# Altium PCB frostlightmini-pcb-altium.pcbdoc
Units mil, origin at the board's own origin, x right, y up, seen from the top; angles counter-clockwise.
Board outline 3200 x 3105 mil, 2 copper layers (Top Layer, Bottom Layer); 52 components, 41 nets, 192 pads, 320 vias.
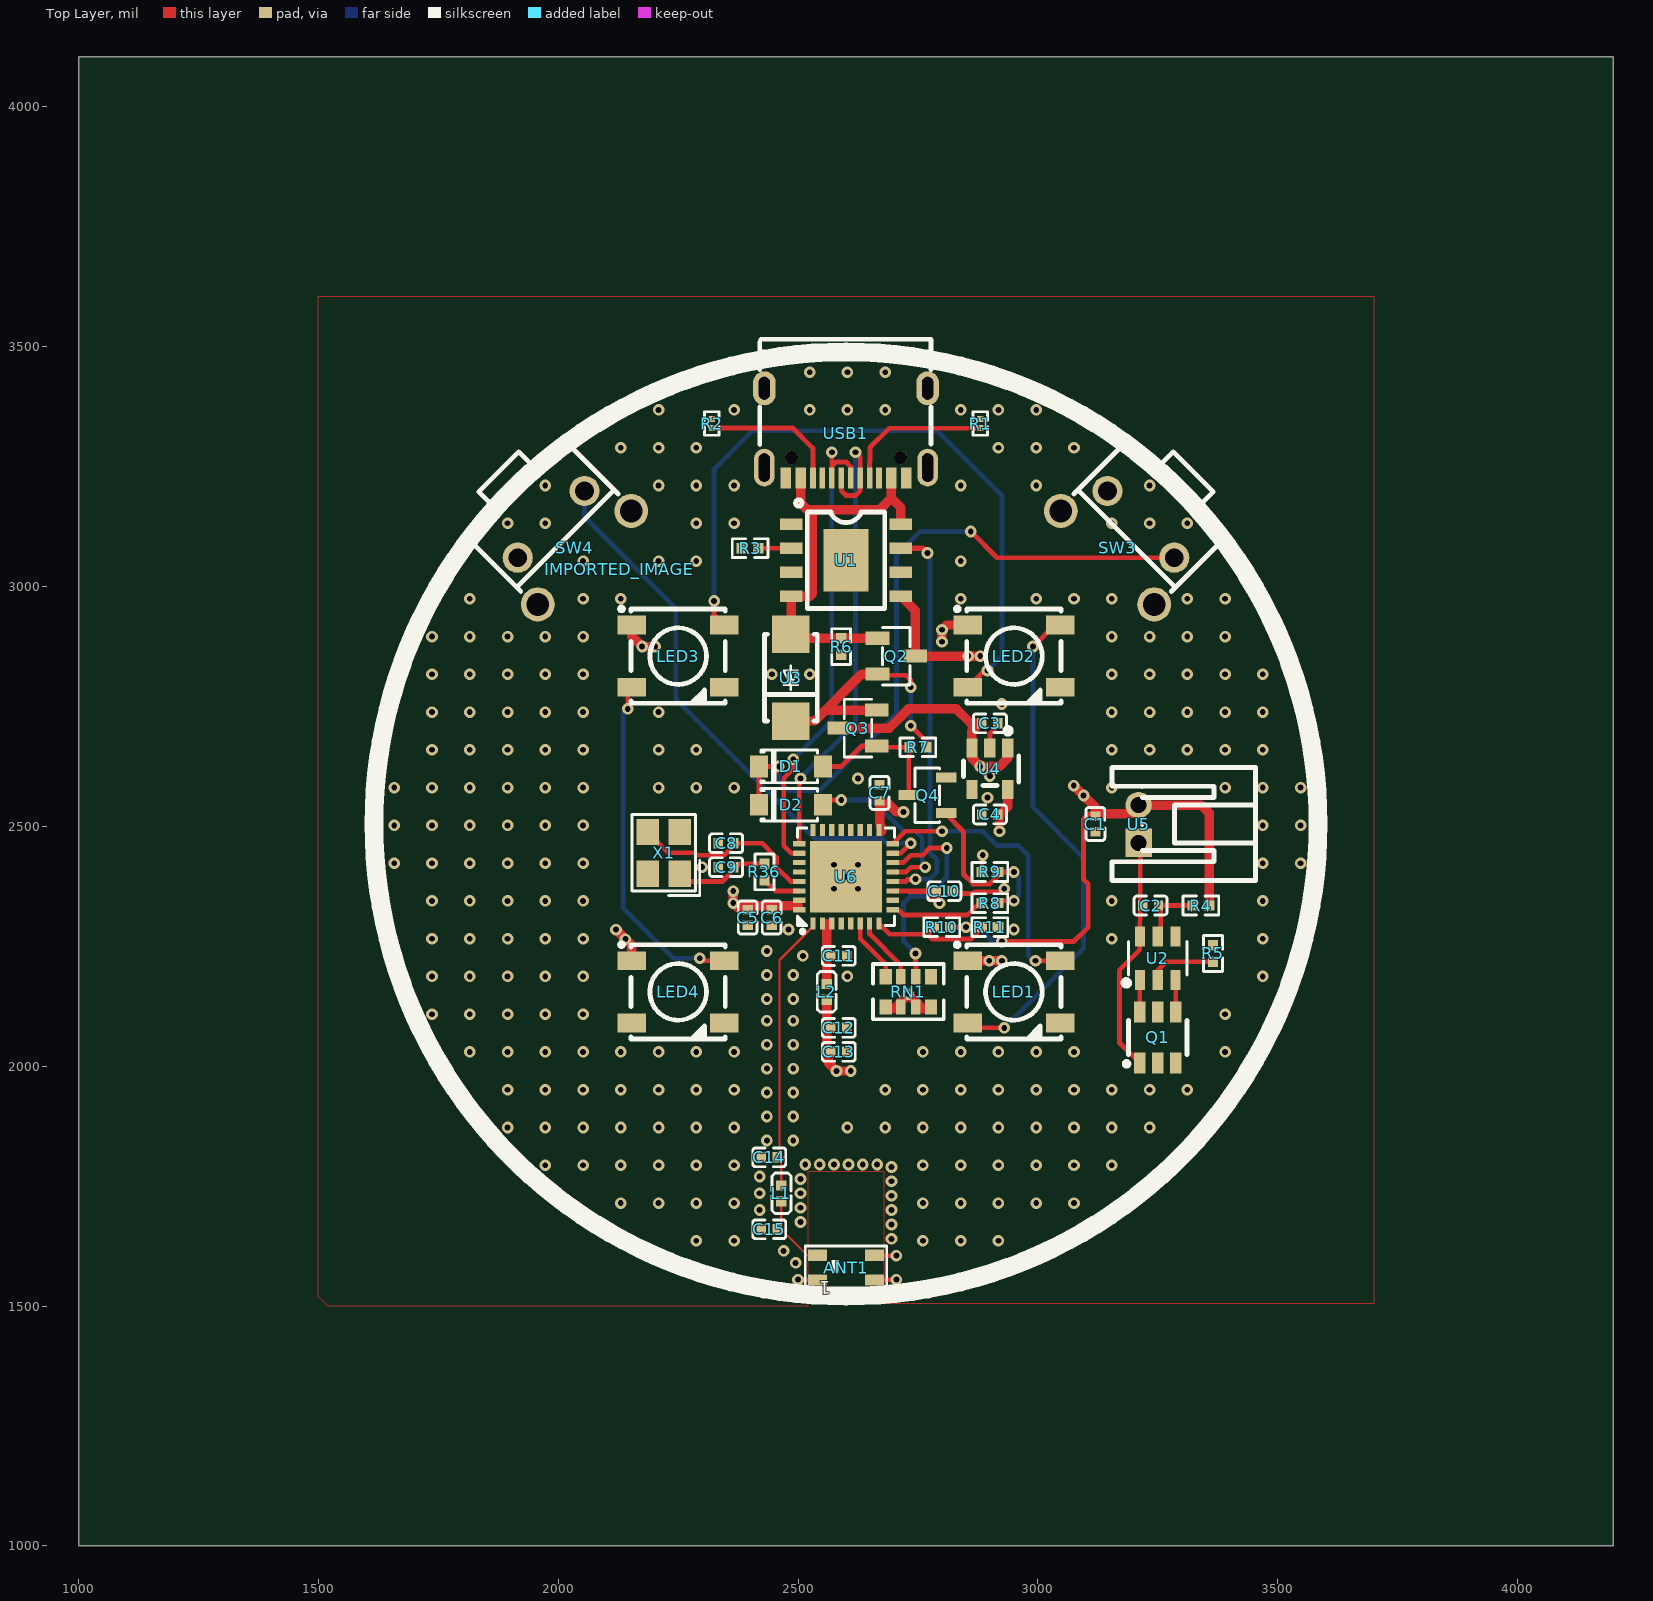
[diagram p0: Top Layer view]
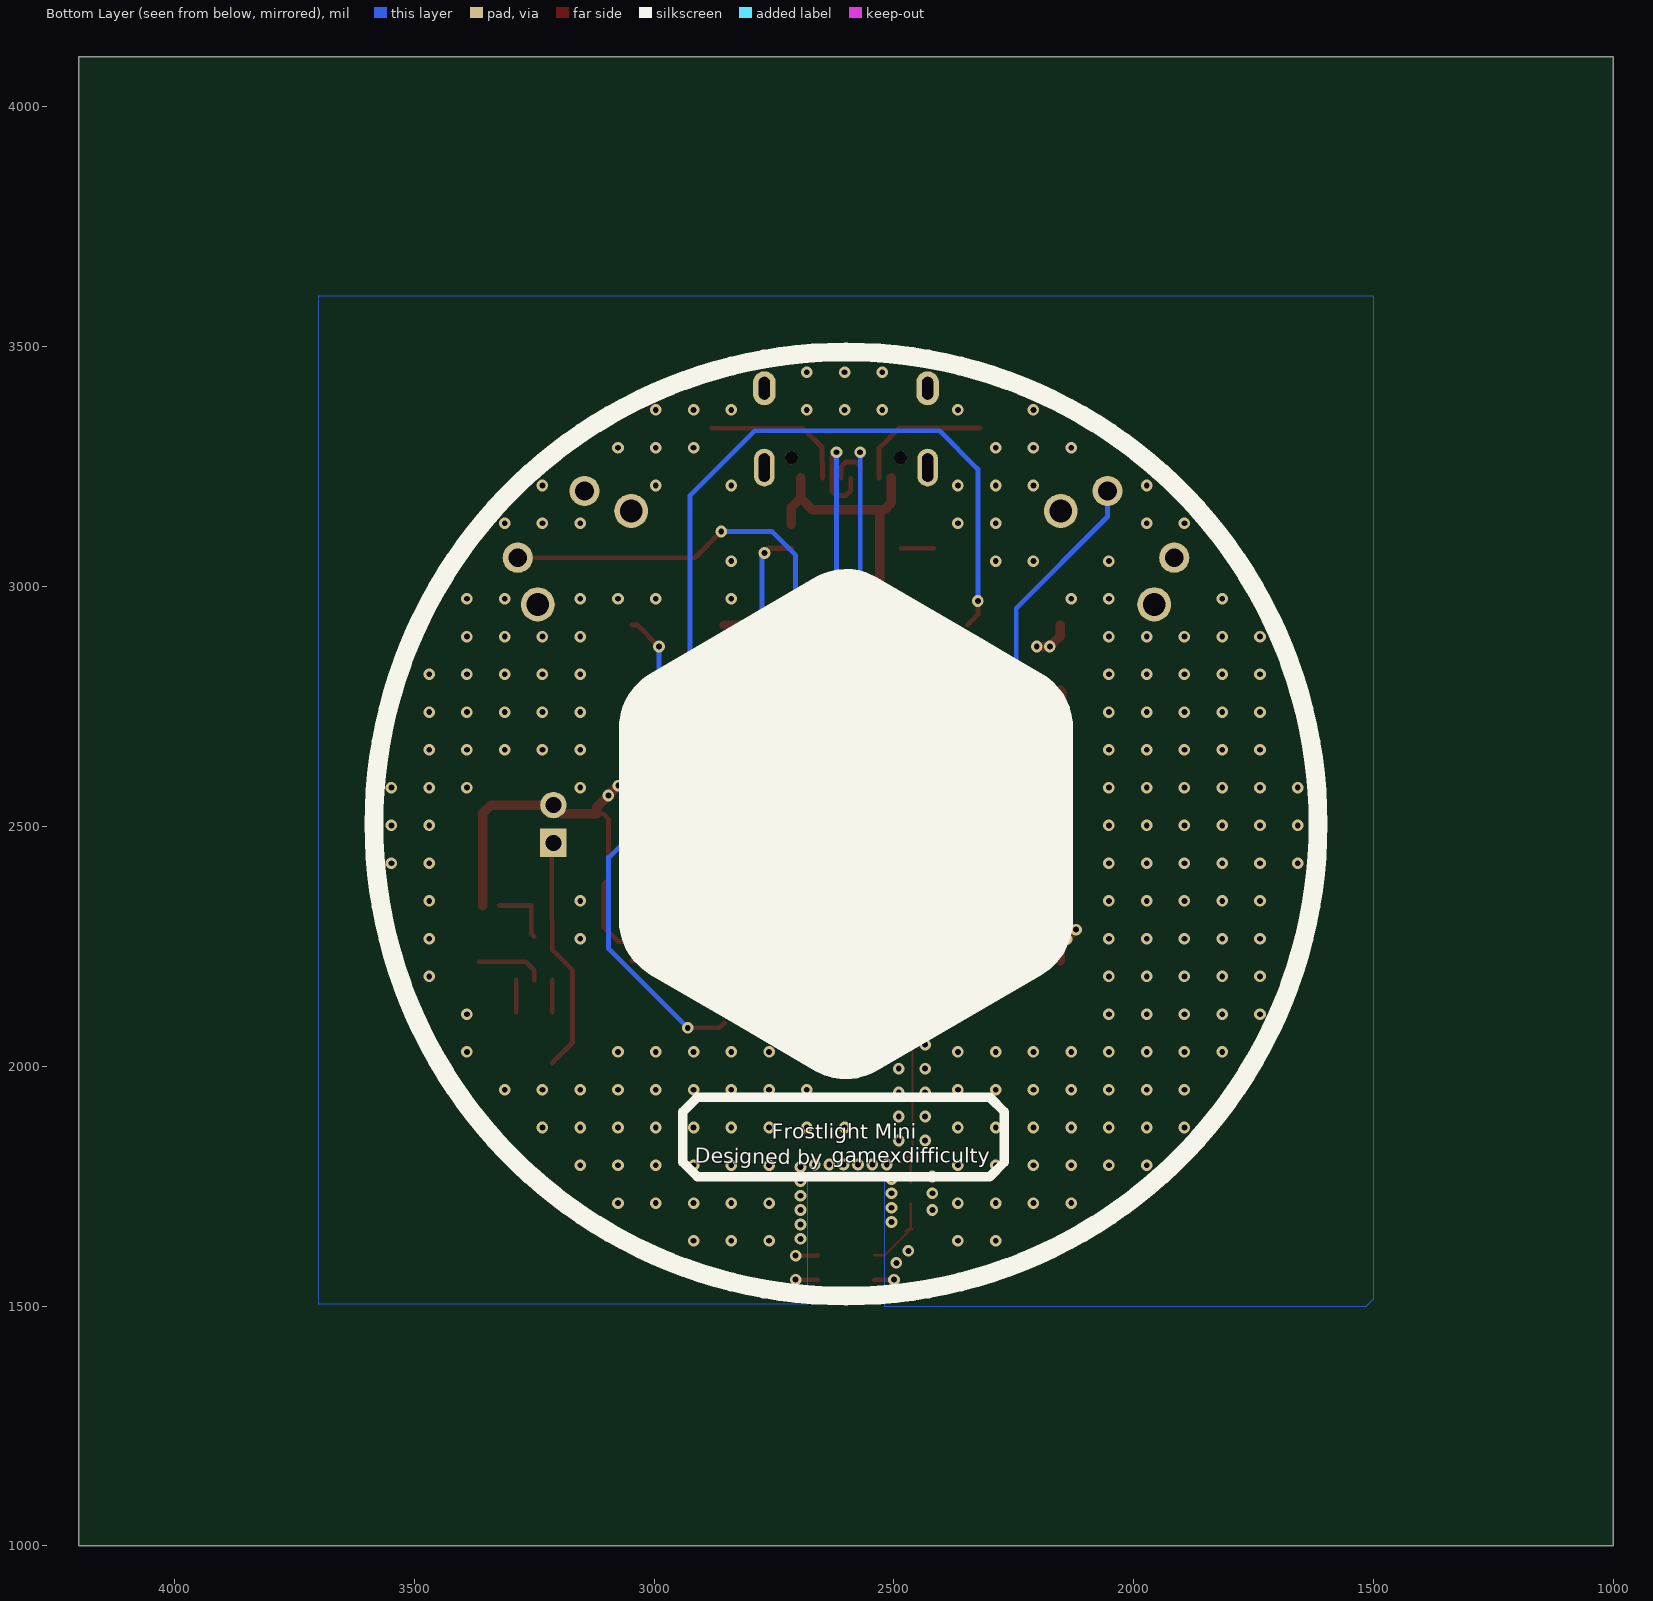
[diagram p1: Bottom Layer view, seen from below]

## Layer stack, top to bottom
Top Layer: signal copper (thickness not stored)
Dielectric: dielectric 12.6, FR-4, Dk 4.8
Bottom Layer: signal copper (thickness not stored)

## Board outline
4200,1000 1000,1000 1000,4105 4200,4105

## Components (designator, comment, footprint, x,y, rotation, side; value= is the part's Value field where it differs from the comment)
ANT1 "2450AT18D0100E" ANT-SMD_4P-L3.2-W1.6 2600,1580 r0 top
C1 "10uF" C0402 3120,2505 r270 top
C2 "10uF" C0402 3235,2335 r0 top
C3 "10uF" C0402 2900,2715 r0 top
C4 "10uF" C0402 2900,2525 r180 top
C5 "10nF" C0402 2395,2310 r90 top
C6 "1uF" C0402 2445,2310 r90 top
C7 "100nF" C0402 2670,2570 r90 top
C8 "10pF" C0402 2350,2465 r180 top
C9 "10pF" C0402 2350,2415 r0 top
C10 "100nF" C0402 2805,2365 r0 top
C11 "100nF" C0402 2585,2230 r180 top
C12 "100nF" C0402 2585,2080 r180 top
C13 "10uF" C0402 2585,2030 r180 top
C14 "3.3pF" C0402 2440,1810 r180 top
C15 "3.3pF" C0402 2440,1660 r180 top
D1 "BAT42W" SOD-123_L2.8-W1.8-LS3.7-RD 2485,2625 r0 top
D2 "BAT42W" SOD-123_L2.8-W1.8-LS3.7-RD 2485,2545 r0 top
IMPORTED_IMAGE "IMPORTED_IMAGE" IMPORTED_IMAGE 2127.56,3036.49 r0 top
L1 "2.7nH" L0402 2465,1735 r90 top
L2 "2nH" L0402 2560,2155 r270 top
LED1 "WS2812B-B/W" LED-SMD_4P-L5.0-W5.0-TL_WS2812B-B 2950,2155 r0 top
LED2 "WS2812B-B/W" LED-SMD_4P-L5.0-W5.0-TL_WS2812B-B 2950,2855 r0 top
LED3 "WS2812B-B/W" LED-SMD_4P-L5.0-W5.0-TL_WS2812B-B 2250,2855 r0 top
LED4 "WS2812B-B/W" LED-SMD_4P-L5.0-W5.0-TL_WS2812B-B 2250,2155 r0 top
Q1 "FS8205A" SOT-23-6_L2.9-W1.6-P0.95-LS2.8-BR 3250,2060 r270 top
Q2 "DMP1045U-7" SOT-23-3_L2.9-W1.3-P1.90-LS2.4-BR 2705,2855 r180 top
Q3 "SI2301_C2891731" SOT-23-3_L2.9-W1.3-P1.90-LS2.4-BR 2625,2705 r0 top
Q4 "S8050_C20069125" SOT-23-3_L2.9-W1.3-P1.90-LS2.3-BR 2770,2565 r0 top
R1 "5.1kΩ" R0201 2880,3340 r270 top
R2 "5.1kΩ" R0201 2320,3340 r270 top
R3 "2kΩ" R0402 2400,3080 r0 top
R4 "100Ω" R0402 3340,2335 r0 top
R5 "1kΩ" R0402 3365,2235 r270 top
R6 "10kΩ" R0402 2590,2875 r270 top
R7 "1MΩ" R0402 2750,2665 r0 top
R8 "10kΩ" R0402 2900,2340 r180 top
R9 "1MΩ" R0402 2900,2405 r0 top
R10 "100kΩ" R0402 2800,2290 r180 top
R11 "100kΩ" R0402 2900,2290 r180 top
R36 "10Ω" R0402 2430,2405 r90 top
RN1 "10kΩ" RES-ARRAY-SMD_0603-8P-L3.2-W1.6-BL 2730,2155.01 r0 top
SW3 "TS365ZJ" KEY-TH_TS365ZJ 3180,3095 r135 top
SW4 "TS365ZJ" KEY-TH_TS365ZJ 2020,3095 r225 top
U1 "TP4056" ESOP-8_L4.9-W3.9-P1.27-LS6.0-BL-EP 2600,3055 r270 top
U2 "DW01A" SOT-23-6_L2.9-W1.6-P0.95-LS2.8-BL 3250,2225 r0 top
U3 "SS34" DO-214AC_L4.3-W2.7-LS5.2-RD 2485,2810 r90 top
U4 "TPRT9080-33" SOT-23-5_L2.9-W1.6-P0.95-LS2.8-BR 2900,2620 r90 top
U5 "S2B-PH-K-S(LF)(SN)" CONN-TH_S2B-PH-K-S-LF-SN 3210,2505 r270 top
U6 "ESP32-C3FH4" QFN-32_L5.0-W5.0-P0.50-TL-EP3.7 2600,2395 r90 top
USB1 "TYPE-C" USB-C-SMD_TYPE-C-6PIN-2MD-073 2600,3320 r180 top
X1 "40MHz" CRYSTAL-SMD_4P-L3.2-W2.5-BL 2220,2445 r90 top

## Footprints (in the part's own frame and the unit in brackets; to place one, negate y for a bottom-side part, rotate by r counter-clockwise, add the part's x,y. Pads: shape width x height; smd on the part's side, far side on the other; paste and mask are expansions set on the pad)
ANT-SMD_4P-L3.2-W1.6 [mm]
  rect 1x0.6 smd paste+0 mask+0.051: 1(-1.5,-0.65) 2(1.5,-0.65) 3(1.5,0.65) 4(-1.5,0.65)
  silkscreen extent -2.16,-1.14 2.16,1.14
C0402 [mm]
  rect 0.5x0.54 smd paste+0 mask+0.051: 1(-0.42,0) 2(0.42,0)
  silkscreen extent -0.87,-0.5 0.87,0.5
CONN-TH_S2B-PH-K-S-LF-SN [mm]
  rect 1.5x1.4 hole 0.85 paste+0 mask+0.051: 1(1,0)
  round 1.4 hole 0.85 paste+0 mask+0.051: 2(-1,0)
  silkscreen extent -3,-1.4 3,6.2
CRYSTAL-SMD_4P-L3.2-W2.5-BL [mm]
  rect 1.4x1.2 smd paste+0 mask+0.051: 1(-1.1,-0.85) 2(1.1,-0.85) 3(1.1,0.85) 4(-1.1,0.85)
  silkscreen extent -2.26,-1.91 2.03,1.68
DO-214AC_L4.3-W2.7-LS5.2-RD [mm]
  rect 2x2 smd paste+0 mask+0.051: 1(-2.3,0) 2(2.3,0)
  silkscreen extent -2.3,-1.4 2.3,1.4
ESOP-8_L4.9-W3.9-P1.27-LS6.0-BL-EP [mm]
  rect 0.6x1.2 smd paste+0 mask+0.051: 1(-1.905,-2.908) 2(-0.635,-2.908) 3(0.635,-2.908) 4(1.905,-2.908) 5(1.905,2.908) 6(0.635,2.908) 7(-0.635,2.908) 8(-1.905,2.908)
  rect 3.3x2.4 smd paste+0 mask+0.051: 9(0,0)
  silkscreen extent -3.2,-2.67 2.55,2.05
IMPORTED_IMAGE [mil]
KEY-TH_TS365ZJ [mm]
  round 1.6 hole 1 paste+0 mask+0.051: 1(-2.5,-1.25) 2(2.5,-1.25)
  round 1.8 hole 1.2 paste+0 mask+0.051: 3(-3.5,1.25) 4(3.5,1.25)
  silkscreen extent -3.65,-5.17 3.65,0.13
L0402 [mm]
  rect 0.54x0.54 smd paste+0 mask+0.051: 1(-0.42,0) 2(0.42,0)
  silkscreen extent -1.07,-0.51 1.07,0.49
LED-SMD_4P-L5.0-W5.0-TL_WS2812B-B [mm]
  rect 1.5x1 smd paste+0 mask+0.051: 1(-2.45,1.65) 2(-2.45,-1.65) 3(2.45,-1.65) 4(2.45,1.65)
  silkscreen extent -3.1,-2.5 2.5,2.6
QFN-32_L5.0-W5.0-P0.50-TL-EP3.7 [mm]
  rect 0.65x0.28 smd paste-100 mask+0.051: 1(-2.478,1.75) 2(-2.478,1.25) 3(-2.478,0.75) 4(-2.478,0.25) 5(-2.478,-0.25) 6(-2.478,-0.75) 7(-2.478,-1.25) 8(-2.478,-1.75) 17(2.478,-1.75) 18(2.478,-1.25) 19(2.478,-0.75) 20(2.478,-0.25) 21(2.478,0.25) 22(2.478,0.75) 23(2.478,1.25) 24(2.478,1.75)
  rect 0.28x0.65 smd paste-100 mask+0.051: 9(-1.75,-2.478) 10(-1.25,-2.478) 11(-0.75,-2.478) 12(-0.25,-2.478) 13(0.25,-2.478) 14(0.75,-2.478) 15(1.25,-2.478) 16(1.75,-2.478) 25(1.75,2.478) 26(1.25,2.478) 27(0.75,2.478) 28(0.25,2.478) 29(-0.25,2.478) 30(-0.75,2.478) 31(-1.25,2.478) 32(-1.75,2.478)
  rect 3.8x3.8 smd paste-100 mask+0.051: 33(0,0)
  silkscreen extent -3,-2.58 2.58,2.58
R0201 [mil]
  rect 11.93x12.76 smd paste-3937.01 mask+2: 1(-9.51,0) 2(9.51,0)
  silkscreen extent -24,-15 24,15
R0402 [mm]
  rect 0.566x0.54 smd paste-100 mask+0.051: 1(-0.433,0) 2(0.433,0)
  silkscreen extent -0.94,-0.5 0.94,0.5
RES-ARRAY-SMD_0603-8P-L3.2-W1.6-BL [mm]
  rect 0.65x0.8 smd paste+0 mask+0.051: 1(-1.2,-0.8) 4(1.2,-0.8) 5(1.2,0.8) 8(-1.2,0.8)
  rect 0.5x0.8 smd paste+0 mask+0.051: 2(-0.4,-0.8) 3(0.4,-0.8) 6(0.4,0.8) 7(-0.4,0.8)
  silkscreen extent -1.87,-1.45 1.87,1.47
SOD-123_L2.8-W1.8-LS3.7-RD [mm]
  rect 0.95x1.15 smd paste+0 mask+0.051: 1(-1.693,0) 2(1.693,0)
  silkscreen extent -1.58,-0.87 1.41,0.87
SOT-23-3_L2.9-W1.3-P1.90-LS2.3-BR [mm]
  rect 1.07x0.532 smd paste+0 mask+0.051: 1(0.99,-0.95) 2(0.99,0.95) 3(-0.99,0)
  silkscreen extent -0.66,-1.45 0.64,1.45
SOT-23-3_L2.9-W1.3-P1.90-LS2.4-BR [mm]
  rect 1.25x0.7 smd paste+0 mask+0.051: 1(1,-0.95) 2(1,0.95) 3(-1,0)
  silkscreen extent -0.73,-1.53 0.73,1.53
SOT-23-5_L2.9-W1.6-P0.95-LS2.8-BR [mm]
  rect 1x0.6 smd paste+0 mask+0.05: 1(1.1,-0.95) 2(1.1,0) 3(1.1,0.95) 4(-1.1,0.95) 5(-1.1,-0.95)
  silkscreen extent -0.89,-1.52 2.16,1.4
SOT-23-6_L2.9-W1.6-P0.95-LS2.8-BL [mm]
  rect 0.532x1.072 smd paste+0 mask+0.051: 1(-0.95,-1.149) 2(0,-1.149) 3(0.95,-1.149) 4(0.95,1.149) 5(0,1.149) 6(-0.95,1.149)
  silkscreen extent -1.82,-1.45 1.54,0.89
SOT-23-6_L2.9-W1.6-P0.95-LS2.8-BR [mm]
  rect 1.1x0.6 smd paste+0 mask+0.051: 1(1.35,-0.95) 2(1.35,0) 3(1.35,0.95) 4(-1.35,0.95) 5(-1.35,0) 6(-1.35,-0.95)
  silkscreen extent -0.9,-1.78 1.52,1.55
USB-C-SMD_TYPE-C-6PIN-2MD-073 [mm]
  rect 0.55x1.1 smd paste-100 mask+0.05: 1(-3.2,2.375) 2(-2.4,2.375) 11(2.4,2.375) 12(3.2,2.375)
  rect 0.3x1.1 smd paste-100 mask+0.05: 3(-1.75,2.375) 4(-1.25,2.375) 5(-0.75,2.375) 6(-0.25,2.375) 7(0.25,2.375) 8(0.75,2.375) 9(1.25,2.375) 10(1.75,2.375)
  oval 1.2x1.8 hole 0.6 slot 1.2 at 90 deg paste+0 mask+0.05: 13(-4.325,-2.375) 14(4.325,-2.375)
  oval 1.1x2 hole 0.6 slot 1.5 at 90 deg paste+0 mask+0.05: 13(-4.325,1.825) 14(4.325,1.825)
  round 0.7 hole 0.7 unplated paste+0: ""(-2.89,1.305) ""(2.89,1.305)
  silkscreen extent -4.5,-4.97 4.57,0.6

## Via types
v1: diameter 24.02, hole 12.01, Top Layer to Bottom Layer, tented both sides, 216 vias
v2: diameter 24.41, hole 12.2, Top Layer to Bottom Layer, tented both sides, 104 vias

## Nets (pads, with @x,y where several pads share a name; then routed paths per layer and width w, separated by ;. In a path a pad name is that pad's centre, name@x,y a point inside that pad or via, vN(x,y) a via of type N, cw(c..) or ccw(c..) an arc to the next point about the centre after c; other vN are vias at no path point)
3.3V: C4.1 C5.2 C6.2 C7.1 C10.1 C12.2 C13.2 L2.2 RN1.1 RN1.2 RN1.3 RN1.4 U4.5 U6.11 U6.17 U6.31 U6.32 | length 2590.8
  Top Layer w10: U6.11 2730,2365.47
  Top Layer w11.81: 2731.46,2365 C10.1@2785,2365
  Top Layer w19.68: v2(2365,2365) v2(2365,2340) 2373.54,2331.46 C5.2@2395,2331.46 ; C5.2@2395,2335 2500,2335 ; L2.2@2560,2133.5 2560,2030 C13.2@2563.5,2030 ; C13.2@2563.54,2030 2563.54,2006.46 v2(2580,1990) v2(2610,1990) ; 2675,2490 2670,2510 2670,2548.5 2686.5,2548.5 2705,2530 v2(2720,2530) ; RN1.1@2682.76,2119.57 2699.57,2119.57 v2(2730,2150) ; RN1.2@2714.25,2119.57 2714.25,2134.25 v2(2730,2150) ; RN1.3@2745.75,2119.57 2745.75,2134.25 v2(2730,2150) ; RN1.4@2777.24,2119.57 2760.43,2119.57 v2(2730,2150) ; C10.1@2783.54,2365 2783.54,2351.46 v2(2795,2340) ; v2(2920,2490) 2920,2523.54 2921.46,2525 2937.4,2540.94 U4.5
  Mid-Layer 2 w19.68: v2(2365,2340) v2(2365,2365) 2400,2400 2400,2440 2480,2520 2710,2520 v2(2720,2530) 2780,2530 ; v2(2580,1990) v2(2610,1990) 2620,1990 2730,2100 v2(2730,2150) 2835,2255 2880,2255 2940,2315 2965,2315 2995,2345 2995,2370 2995,2455 2960,2490 v2(2920,2490) ; 2763.85,2530 2820,2530 2860,2490 v2(2920,2490) ; v2(2795,2340) 2840,2340 2920,2420 v2(2920,2490)
5V: Q2.1 R6.1 U1.4 U1.8 U3.2 USB1.2 USB1.11 | length 850.1
  Top Layer w19.68: U3.2@2485,2900.5 U1.4 2525,2980 2530,2985 2530,3152.61 2537.39,3160 ; U3.2 2493.15,2892.4 Q2.1 ; USB1.11 2505.5,3174.5 2520,3160 2670,3160 2694.5,3184.5 ; USB1.2 2694.5,3184.5 ; U1.8 2714.5,3164.5 2694.5,3184.5
BAT+: C1.1 Q2.3 R4.2 R10.1 U1.5 U5.2 | length 1810.9
  Top Layer w10: R10.1@2817.04,2295 2822.04,2290 v2(2850,2290) ; v2(2925,2260) 3075,2260 3105,2290 3105,2380 3095,2390 3095,2515 3106.5,2526.5 C1.1@3120,2526.5
  Top Layer w19.68: U1.5 2744.37,2950.13 Q2.3 v2(2880,2855) ; v2(3075,2585) v2(3095.43,2564.57) 3120,2540 C1.1@3120,2526.46 ; C1.1@3120,2526.5 3192.1,2526.5 U5.2 ; U5.2 3340.63,2544.37 3357.04,2527.96 R4.2
  Mid-Layer 2 w19.68: v2(2855,2855) v2(2880,2855) 2945,2855 2970,2830 2970,2740 3075,2635 v2(3075,2585) v2(3095.43,2564.57)
  Bottom Layer w10: v2(2850,2290) 2875,2290 2905,2260 v2(2925,2260)
BAT-: C2.1 Q1.1 U2.6 U5.1 | length 495.6
  Top Layer w10: U5.1 3213.54,2462.09 C2.1@3213.54,2335 ; Q1.1@3212.6,2006.85 3170,2049.45 3170,2200 3212.6,2242.6 U2.6 ; U2.6 C2.1@3213.5,2335
BATV: R10.2 R11.2 U6.8 | length 269.4
  Top Layer w10: U6.8 2691.36,2275 2770,2275 ; R10.2@2782.96,2295 2782.96,2287.96 2770,2275 ; R11.2@2883,2295 2883,2288 2860,2265 2780,2265 2770,2275
BTN1: SW4.1 U6.15 | length 1173.5
  Top Layer w10: U6.15 2714.21,2444.21 v2(2735,2465)
  Bottom Layer w10: SW4.1 2054.8,3145.2 2245,2955 2245,2765 2535,2475 2675,2475 2685,2465 v2(2735,2465)
BTN2: D2.2 U6.13 | length 379.4
  Top Layer w10: D2.2 2561.63,2555 v2(2590,2555) ; U6.13 2724.84,2404.84 2735,2415 v2(2765,2415)
  Bottom Layer w10: v2(2590,2555) 2655,2555 2720,2490 2745,2490 2758.95,2476.05 2758.95,2421.05 v2(2765,2415)
CHRG: U1.7 U6.12 | length 836.6
  Top Layer w10: U6.12 2724.09,2385 2728.22,2389.13 2744.13,2389.13 v2(2745,2390)
  Top Layer w11.81: U1.7 2760,3080 v2(2770,3070)
  Bottom Layer w10: v2(2745,2390) 2775,2390 2790,2405 2790,2430 2775,2445 2775,3070 v2(2770,3070)
D1_2: D1.2 Q3.1 Q4.3 R7.1 | length 300.9
  Top Layer w10: D1.2 2590,2625 2632.6,2667.6 Q3.1 ; Q3.1 2666.97,2665 R7.1 2731.01,2663.05 Q4.3
D2_1: D1.1 D2.1 SW3.1 | length 1424
  Top Layer w10: D2.1 D1.1 v2(2460,2625) ; v2(2860,3115) 2914.8,3060.2 SW3.1
  Bottom Layer w10: v2(2460,2625) 2460,2595 2480,2575 2545,2575 2705,2735 2705,3065 2755,3115 v2(2860,3115)
D+: U6.26 USB1.6 USB1.8 | length 1025.2
  Top Layer w10: v2(2490,2640) 2490,2620 2470,2600 2470,2460 2485.8,2444.2 U6.26 ; USB1.8 2570.5,3250.5 ; v2(2570.5,3280) 2570.5,3250.5 ; USB1.6 2609.8,3250.2 2600,3260 2580,3260 2570.5,3250.5
  Bottom Layer w10: v2(2490,2640) 2570.5,2720.5 v2(2570.5,3280)
D-: U6.25 USB1.5 USB1.7 | length 1023.2
  Top Layer w10: U6.25 2502.46,2597.46 v2(2505,2600) ; USB1.7 2590.2,3199.8 2600,3190 2620,3190 2629.5,3199.5 USB1.5 2629.53,3270.47 v2(2620,3280)
  Bottom Layer w10: v2(2505,2600) 2620,2715 v2(2620,3280)
GND: ANT1.1 ANT1.2 ANT1.3 C1.2 C3.2 C4.2 C5.1 C6.1 C7.2 C8.2 C9.1 C10.2 C11.1 C12.1 C13.1 C14.2 C15.2 LED1.3 LED2.3 LED3.3 LED4.3 Q1.3 Q4.2 R1.1 R2.1 R3.1 R5.1 R6.2 R9.1 R11.1 SW3.2 SW3.3 SW3.4 SW4.2 SW4.3 SW4.4 U1.1 U1.3 U1.9 U4.2 U6.33 USB1.1 USB1.12 USB1.13 USB1.14 X1.2 X1.4 | length 338.9
  Top Layer w10: v2(2500,1555) ANT1.1 ; ANT1.2 v2(2705,1555) ; ANT1.3 v2(2705,1605) ; C10.2@2826.46,2365 2831.46,2360 2865,2360 2868.95,2363.95 2923.95,2363.95 v2(2930,2370) ; R9.1 2882.96,2437.96 v2(2885,2440) ; U4.2 2900,2693.54 C3.2@2921.46,2715
  other v1: 2287.98,1635.99 2366.72,1635.99 2760.42,1635.99 2839.16,1635.99 2917.9,1635.99 2130.5,1714.73 2209.24,1714.73 2287.98,1714.73 2366.72,1714.73 2760.42,1714.73 2839.16,1714.73 2917.9,1714.73 2996.64,1714.73 3075.38,1714.73 1973.02,1793.47 2051.76,1793.47 2130.5,1793.47 2209.24,1793.47 2287.98,1793.47 2366.72,1793.47 2760.42,1793.47 2839.16,1793.47 2917.9,1793.47 2996.64,1793.47 3075.38,1793.47 3154.12,1793.47 1894.28,1872.21 1973.02,1872.21 2051.76,1872.21 2130.5,1872.21 2209.24,1872.21 2287.98,1872.21 2366.72,1872.21 2602.94,1872.21 2681.68,1872.21 2760.42,1872.21 2839.16,1872.21 2917.9,1872.21 2996.64,1872.21 3075.38,1872.21 3154.12,1872.21 3232.86,1872.21 1894.28,1950.95 1973.02,1950.95 2051.76,1950.95 2130.5,1950.95 2209.24,1950.95 2287.98,1950.95 2366.72,1950.95 2681.68,1950.95 2760.42,1950.95 2839.16,1950.95 2917.9,1950.95 2996.64,1950.95 3075.38,1950.95 3154.12,1950.95 3232.86,1950.95 3311.6,1950.95 1815.54,2029.69 1894.28,2029.69 1973.02,2029.69 2051.76,2029.69 2130.5,2029.69 2209.24,2029.69 2287.98,2029.69 2366.72,2029.69 2760.42,2029.69 2839.16,2029.69 2917.9,2029.69 2996.64,2029.69 3075.38,2029.69 3390.34,2029.69 1736.8,2108.43 1815.54,2108.43 1894.28,2108.43 1973.02,2108.43 2051.76,2108.43 3390.34,2108.43 1736.8,2187.17 1815.54,2187.17 1894.28,2187.17 1973.02,2187.17 2051.76,2187.17 2602.94,2187.17 3469.08,2187.17 1736.8,2265.91 1815.54,2265.91 1894.28,2265.91 1973.02,2265.91 2051.76,2265.91 3154.12,2265.91 3469.08,2265.91 1736.8,2344.65 1815.54,2344.65 1894.28,2344.65 1973.02,2344.65 2051.76,2344.65 3154.12,2344.65 3469.08,2344.65 1658.06,2423.39 1736.8,2423.39 1815.54,2423.39 1894.28,2423.39 1973.02,2423.39 2051.76,2423.39 3469.08,2423.39 3547.82,2423.39 1658.06,2502.13 1736.8,2502.13 1815.54,2502.13 1894.28,2502.13 1973.02,2502.13 2051.76,2502.13 3469.08,2502.13 3547.82,2502.13 1658.06,2580.87 1736.8,2580.87 1815.54,2580.87 1894.28,2580.87 1973.02,2580.87 2051.76,2580.87 2209.24,2580.87 2287.98,2580.87 2366.72,2580.87 3154.12,2580.87 3390.34,2580.87 3469.08,2580.87 3547.82,2580.87 1736.8,2659.61 1815.54,2659.61 1894.28,2659.61 1973.02,2659.61 2051.76,2659.61 2209.24,2659.61 2287.98,2659.61 3154.12,2659.61 3232.86,2659.61 3311.6,2659.61 3390.34,2659.61 3469.08,2659.61 1736.8,2738.35 1815.54,2738.35 1894.28,2738.35 1973.02,2738.35 2051.76,2738.35 2209.24,2738.35 3154.12,2738.35 3232.86,2738.35 3311.6,2738.35 3390.34,2738.35 3469.08,2738.35 1736.8,2817.09 1815.54,2817.09 1894.28,2817.09 1973.02,2817.09 2051.76,2817.09 2445.46,2817.09 2524.2,2817.09 3154.12,2817.09 3232.86,2817.09 3311.6,2817.09 3390.34,2817.09 3469.08,2817.09 1736.8,2895.83 1815.54,2895.83 1894.28,2895.83 1973.02,2895.83 2051.76,2895.83 3154.12,2895.83 3232.86,2895.83 3311.6,2895.83 3390.34,2895.83 1815.54,2974.57 2051.76,2974.57 2130.5,2974.57 2839.16,2974.57 2996.64,2974.57 3075.38,2974.57 3154.12,2974.57 3311.6,2974.57 3390.34,2974.57 2051.76,3053.31 2209.24,3053.31 2287.98,3053.31 2839.16,3053.31 1894.28,3132.05 1973.02,3132.05 2287.98,3132.05 2366.72,3132.05 3154.12,3132.05 3232.86,3132.05 3311.6,3132.05 1973.02,3210.79 2209.24,3210.79 2287.98,3210.79 2366.72,3210.79 2839.16,3210.79 2996.64,3210.79 3232.86,3210.79 2130.5,3289.53 2209.24,3289.53 2287.98,3289.53 2917.9,3289.53 2996.64,3289.53 3075.38,3289.53 2209.24,3368.27 2366.72,3368.27 2524.2,3368.27 2602.94,3368.27 2681.68,3368.27 2839.16,3368.27 2917.9,3368.27 2996.64,3368.27 2524.2,3447.01 2602.94,3447.01 2681.68,3447.01
  other v2: 2495,1590 2470,1615 2695,1640 2695,1670 2505,1675 2420,1700 2695,1700 2505,1705 2695,1730 2420,1735 2505,1735 2695,1760 2505,1765 2420,1770 2695,1790 2515,1795 2545,1795 2575,1795 2605,1795 2635,1795 2665,1795 2435,1845 2490,1845 2435,1895 2490,1895 2435,1945 2490,1945 2435,1995 2490,1995 2435,2045 2490,2045 2435,2095 2490,2095 2435,2140 2490,2140 2435,2190 2490,2190 2510,2230 2435,2240 2480,2285 2950,2285 2575,2370 2625,2370 2600,2395 2300,2415 2575,2420 2625,2420 2895,2560 2625,2600 2925,2755
L1_1: ANT1.4 C15.1 L1.1 | length 174.9
  Top Layer w4.72: L1.1@2465,1713.54 C15.1@2465,1660 ; 2475.59,1655.87 2471.46,1660 C15.1@2461.46,1660 ; ANT1.4@2540.95,1605.59 2519.41,1605.59 C15.1@2465,1660 ; C15.1@2461.46,1660 C15.1@2465,1660 ; C15.1@2461.46,1660 C15.1@2465,1660
LAT: R8.2 U6.9 | length 202.5
  Top Layer w10: U6.9 2708.9,2326.1 2720,2315 2853,2315 R8.2@2883,2345
LED1_2: LED1.2 LED2.4 | length 1062.5
  Top Layer w10: LED1.2 2863.58,2080 v2(2930,2080) ; v2(2990,2875) 3034.96,2919.96 LED2.4@3046.45,2919.96
  Bottom Layer w10: v2(2930,2080) 3095,2245 3095,2435 2990,2540 v2(2990,2875)
LED2_2: LED2.2 LED3.4 | length 1456.3
  Top Layer w10: v2(2325,2970) 2325,2941.41 LED3.4@2346.45,2919.96 ; LED2.2 2888.5,2825 v2(2895,2825)
  Bottom Layer w10: v2(2325,2970) 2325,3245 2405,3325 2790,3325 2925,3190 2925,2855 v2(2895,2825)
LED3_2: LED3.2 LED4.4 | length 724.7
  Top Layer w10: v2(2145,2745) 2145,2781.5 LED3.2 ; v2(2295,2225) 2300.04,2219.96 LED4.4@2346.45,2219.96
  Bottom Layer w10: v2(2145,2745) 2135,2735 2135,2330 2240,2225 v2(2295,2225)
LEDDATA: LED1.4 U6.16 | length 594.6
  Top Layer w10: U6.16 2723.64,2490 v2(2800,2490) ; v2(2995,2220) LED1.4
  Bottom Layer w10: v2(2800,2490) 2885,2490 2915,2460 2960,2460 2980,2440 2980,2230 2990,2220 v2(2995,2220)
Q1_4: Q1.4 U2.3 | length 66.6
  Top Layer w10: Q1.4@3287.4,2113.15 U2.3
Q1_6: Q1.6 U2.1 | length 66.6
  Top Layer w10: Q1.6@3212.6,2113.15 U2.1
Q4_1: Q4.1 R8.1 R9.2 | length 373.4
  Top Layer w10: Q4.1@2807.8,2526.4 2845,2489.2 2845,2400 2865,2380 2900,2380 2917,2397 R9.2 ; R8.1 2922.04,2345 v2(2950,2345) ; R9.2 v2(2950,2405)
  Bottom Layer w10: v2(2950,2345) 2960,2355 2960,2395 v2(2950,2405)
S$19152: 
S$19156: 
S$19166: 
S$19170: 
U1_2: R3.2 U1.2 | length 68.5
  Top Layer w10: R3.2 U1.2
U2_2: R5.2 U2.2 | length 142.7
  Top Layer w10: U2.2 3250,2200 3268,2218 R5.2
U2_5: C2.2 R4.1 U2.5 | length 133.9
  Top Layer w10: U2.5 3256.46,2276.7 3256.46,2335 R4.1
U6_1: C14.1 L1.2 U6.1 | length 586.9
  Top Layer w4.72: L1.2@2465,1756.46 2465,1810 C14.1@2461.46,1810 ; 2475,1810 C14.1@2461.46,1810 ; U6.1 2531.1,2291.1 2461.46,2221.46 C14.1@2461.46,1810
U6_2: C11.2 L2.1 U6.2 U6.3 | length 126
  Top Layer w19.68: L2.1@2560,2176.46 2560,2226.46 C11.2@2563.54,2230 ; 2560,2297.5 2560,2230 C11.2@2563.5,2230
U6_6: RN1.8 U6.6 | length 129.1
  Top Layer w10: U6.6 2629.53,2265.47 2682.76,2212.24 RN1.8@2682.76,2190.43
U6_7: RN1.7 U6.7 | length 134.1
  Top Layer w10: U6.7 2649.2,2275.8 2714.3,2210.7 RN1.7@2714.3,2190.4
U6_14: RN1.6 U6.14 | length 457.9
  Top Layer w10: U6.14 2719.5,2424.5 2735,2440 2760,2440 2775,2455 v2(2810,2455) ; v2(2745,2235) RN1.6@2745.7,2190.4
  Bottom Layer w10: v2(2745,2235) 2720,2260 2720,2340 2735,2355 2770,2355 2810,2395 v2(2810,2455)
U6_30: R36.1 U6.30 | length 81.8
  Top Layer w10: R36.1 2452.49,2365.47 U6.30
USB1_4: R1.2 USB1.4 | length 310.3
  Top Layer w10: USB1.4 2650,3290 2690,3330 2850,3330 2879.51,3330 R1.2
USB1_10: R2.2 USB1.10 | length 290.7
  Top Layer w10: R2.2 2489.5,3330.5 2531.1,3288.9 USB1.10
VCC: Q2.2 Q3.2 R7.2 U3.1 | length 597.4
  Top Layer w10: Q2.2 2668.23,2815 2725,2815 2735,2805 v2(2735,2790) ; v2(2735,2710) 2767.04,2677.96 R7.2
  Top Layer w19.68: 2556.8,2741.8 Q3.2 ; Q2.2 2632.6,2817.6 2535,2720 U3.1 ; U3.1 2499.45,2705 U3.1
  Bottom Layer w10: v2(2735,2710) v2(2735,2790)
VIN: C3.1 LED1.1 LED2.1 LED3.1 LED4.1 Q3.3 U4.1 U4.3 | length 3439.2
  Top Layer w19.68: v2(2120.26,2284.74) v2(2140,2265) 2153.54,2251.46 LED4.1 ; LED3.1 2153.54,2896.46 v2(2175,2875) v2(2202.31,2875) ; Q3.3 2690,2705 2730,2745 2830,2745 2860,2715 2878.54,2715 2862.6,2699.06 U4.3 2862.6,2642.4 v2(2880,2625) ; v2(2800,2885) v2(2800,2910) 2809.96,2919.96 LED2.1 ; LED1.1 2853.58,2220 v2(2925,2220) v2(2898.61,2219.96) v2(2898.61,2219.96) ; v2(2900,2605) v2(2880,2625) ; U4.1 2937.4,2642.4 2920,2625 v2(2880,2625)
  Mid-Layer 2 w10: v2(2880,2625) v2(2900,2605)
  Mid-Layer 2 w19.68: v2(2140,2265) v2(2120.26,2284.74) 2105,2300 2105,2825 2155,2875 v2(2202.31,2875) ; v2(2175,2875) v2(2202.31,2875) ; 2800,2658.38 2833.38,2625 v2(2880,2625) v2(2900,2605) ; v2(2898.61,2219.96) v2(2925,2220) 2970,2265 3025,2265 3035,2275 3035,2350 ; v2(2202.31,2875) 2215,2875 2285,2875 2355,2945 2760,2945 2795,2910 v2(2800,2910) ; v2(2800,2885) 2800,2600 2870,2530 2975,2530 3035,2470 3035,2350 ; v2(2800,2885) v2(2800,2910) ; v2(2800,2885) v2(2800,2910) ; 3035,2350 3035,2315 3035,2350
XN: C8.1 U6.29 X1.3 | length 391.1
  Top Layer w10: X1.3 2229.84,2445 2285,2445 2290,2440 2346.46,2440 C8.1@2371.46,2465 ; C8.1@2371.5,2465 2425,2465 2455,2435 2455,2415 2484.8,2385.2 U6.29
XP: C9.2 R36.2 X1.1 | length 198.8
  Top Layer w10: X1.1 2270.15,2385 2341.46,2385 2371.46,2415 2378.5,2422.04 R36.2
pads on no net: LED4.2 Q1.2 Q1.5 RN1.5 U1.6 U2.4 U4.4 U6.4 U6.5 U6.10 U6.18 U6.19 U6.20 U6.21 U6.22 U6.23 U6.24 U6.27 U6.28 USB1. USB1.3 USB1.9
copper on no net: | length 0

## Polygon pours and split planes (outlines as drawn)
GND on Bottom Layer (solid): 1500,3605 3700,3605 3700,1505 2680,1505 2680,1780 2520,1780 2520,1500 1515,1500 1500,1515
GND on Mid-Layer 2 (solid): 1500,3605 3700,3605 3700,1505 2680,1505 2680,1780 2520,1780 2520,1500 1500,1500
GND on Mid-Layer 1 (solid): 1500,3605 3700,3605 3700,1505 2680,1505 2680,1780 2520,1780 2520,1505 2515,1500 1525,1500 1500,1525
GND on Top Layer (solid): 1500,3605 3700,3605 3700,1505 2680,1505 2680,1780 2520,1780 2520,1500 1520,1500 1500,1520

## Keep-outs
Keep-Out Layer:
  circle w10: c2600,2505 r984.25

## Silkscreen, mask and mechanical layers (free items; w line width, h text height)
Top Overlay:
  circle w39.37: c2600,2505 r984.25
Bottom Overlay:
  circle w39.37: c2600,2505 r984.25
  lines w19.68 net S$19152: 2270,1799.87 2270,1904.87 2300,1934.87
  lines w19.68 net S$19156: 2940,1799.87 2940,1904.87
  lines w19.68 net S$19166: 2300,1934.87 2910,1934.87 2940,1904.87
  lines w19.68 net S$19170: 2270,1799.87 2300,1769.87 2910,1769.87 2940,1799.87
  text "Frostlight Mini" at 2755,1849.25 h31.5
  text "gamexdifficulty" at 2630,1799.12 h31.5
  text "Designed by" at 2915.27,1799.12 h31.5 r1

## Text inside footprints (layer, text, board x,y; h text height)
ANT1: Top Overlay "1" at 2568.55,1551.81 h27.56 r180